# Altium PCB SAMV71_Xplained_Ultra.PcbDoc (part 4 of 7)
Units mm, origin at the board's own origin, x right, y up, seen from the top; angles counter-clockwise.
Board outline 90 x 135 mm, 8 copper layers (Top Layer LF-Signals, Ground Plane 1 (GND), Power Plane (VCC), Ground Plane 2 (GND), Signal Layer 1, Signal Layer 2, Ground Plane 3 (GND), Bottom Layer LF-Signals), stack 1.588 mm thick; 391 components, 330 nets, 1782 pads, 966 vias.
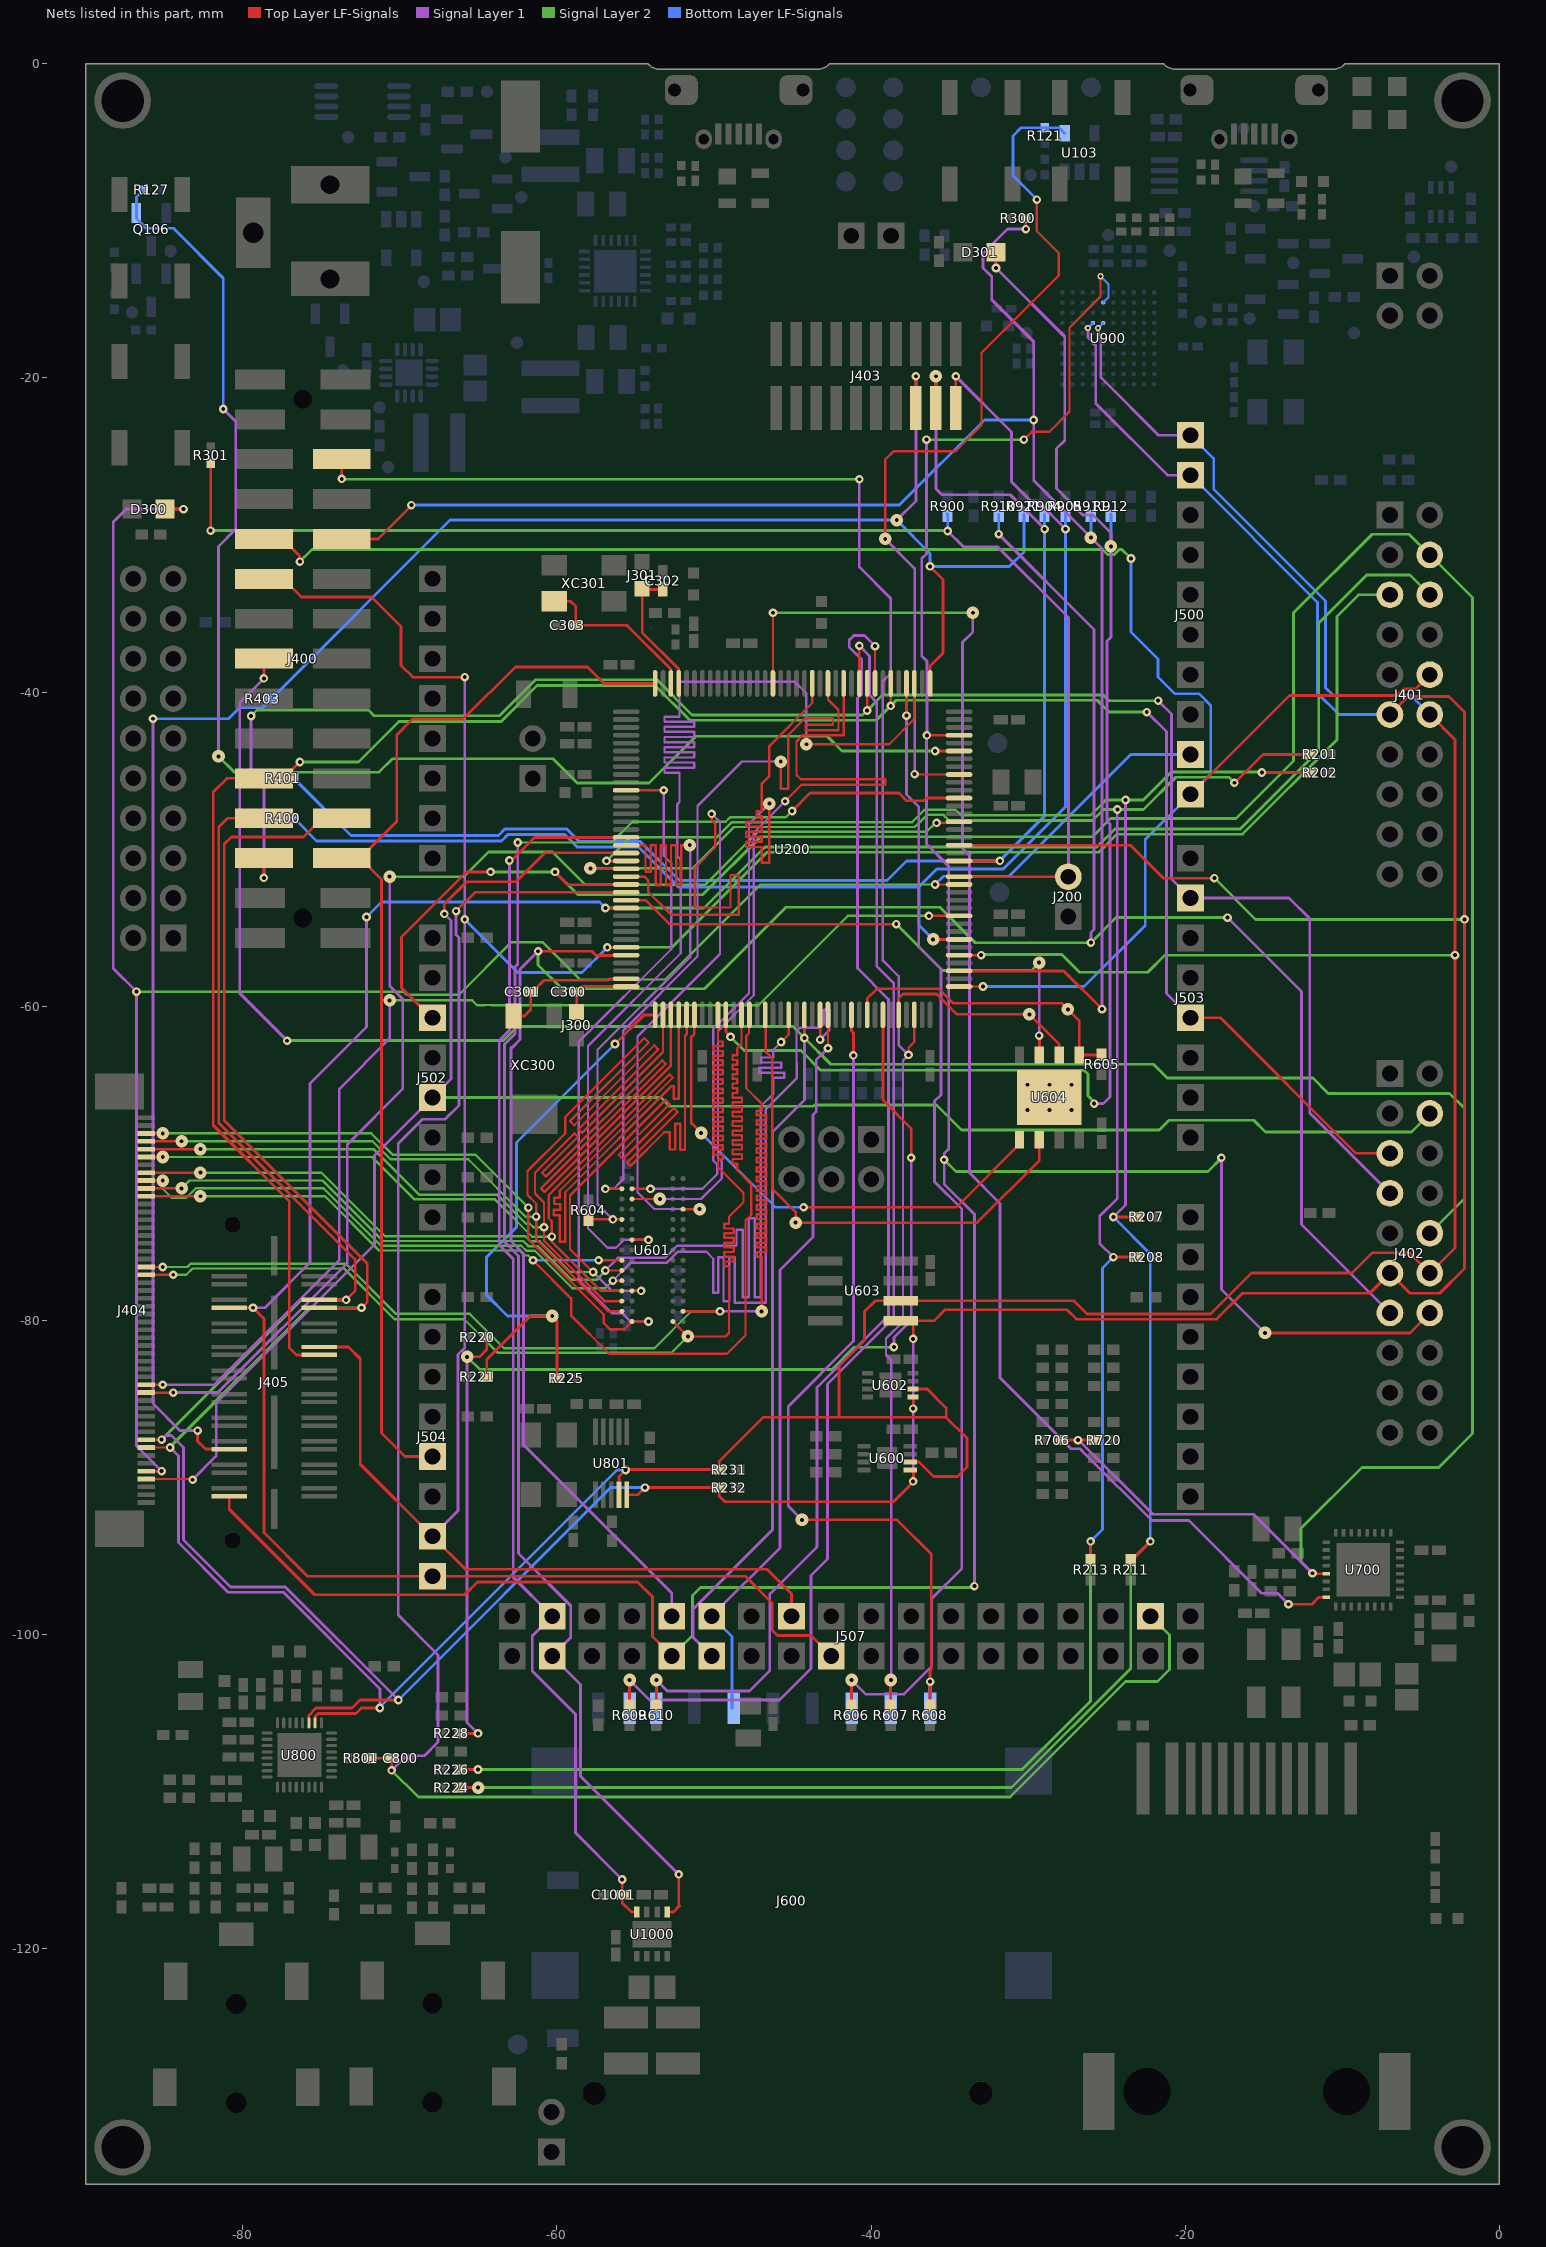
[diagram p10: the nets of this part, all layers, seen from the top]

## Via types
v1: diameter 0.55, hole 0.25, Top Layer LF-Signals to Bottom Layer LF-Signals, 547 vias
v2: diameter 0.55, hole 0.25, Top Layer LF-Signals to Bottom Layer LF-Signals, tented both sides, 190 vias
v3: diameter 0.55/0.55/0.55/0.8 (per signal layer), hole 0.25, Top Layer LF-Signals to Bottom Layer LF-Signals, tented top, 172 vias
v4: diameter 0.55, hole 0.25, Top Layer LF-Signals to Bottom Layer LF-Signals, tented top, 21 vias
v5: diameter 0.4, hole 0.2, Top Layer LF-Signals to Bottom Layer LF-Signals, tented both sides, 16 vias
v6: diameter 0.7, hole 0.35, Top Layer LF-Signals to Bottom Layer LF-Signals, 9 vias
v7: diameter 0.4, hole 0.2, Top Layer LF-Signals to Bottom Layer LF-Signals, tented top, 5 vias
v8: diameter 0.66, hole 0.33, Top Layer LF-Signals to Bottom Layer LF-Signals, tented top, 4 vias
v9: diameter 0.4, hole 0.2, Top Layer LF-Signals to Bottom Layer LF-Signals, 2 vias

## Nets (pads, with @x,y where several pads share a name; then routed paths per layer and width w, separated by ;. In a path a pad name is that pad's centre, name@x,y a point inside that pad or via, vN(x,y) a via of type N, cw(c..) or ccw(c..) an arc to the next point about the centre after c; other vN are vias at no path point) (continued)
PA03: J400.8 J401.11@-6.97,-41.43 J402.11@-6.97,-76.99 J404.42 J405.35 J500.9@-19.67,-26.19 R232.2 U200.91 U600.5 U602.5 U603.5 U800.3 U801.10 U900.G7 | length 290.1
  Top Layer LF-Signals w0.15: J404.42@-86.15,-87.6 v1(-85.175,-87.6)
  Top Layer LF-Signals w0.175: J400.8@-78.661,-48.034 -80.984,-48.034 -81.536,-48.586 -81.536,-67.434 -72.85,-76.12 -72.85,-78.125 v1(-73.425,-78.7) J405.35@-75.13,-78.7 ; U800.3@-75.8,-105.625 -75.8,-105.148 -75.34,-104.687 -73.063,-104.687 -72.543,-104.168 -70.107,-104.168 v1(-70.1,-104.175) ; U801.10@-55.55,-91.1 -54.85,-91.1 v1(-54.4,-90.65) R232.2@-49.675,-90.65 -49.675,-91.175 -49.3,-91.55 -38.575,-91.55 v1@-37.3,-90.275 ; U603.5@-38.125,-80.03 U603.5@-37.37,-80.03 ; U600.5@-37.5,-89.525 -37.3,-89.525 v1@-37.3,-90.25 ; v1(-37.325,-85.625) U602.5@-37.325,-84.875 ; v1(-37.325,-81.175) -37.325,-80.075 U603.5@-37.37,-80.03 ; U200.91@-34.4,-49.75 -23.5,-49.75 -21.4,-51.85 v1(-18.15,-51.85) ; J401.11@-6.97,-41.43 -5.824,-40.284 -3.216,-40.284 -2.225,-41.275 v1(-2.225,-54.475) -2.225,-76.7 -3.8,-78.275 -5.685,-78.275 J402.11@-6.97,-76.99 -8.255,-78.275 -16.35,-78.275 -18.001,-79.926 -26.918,-79.926 -27.52,-79.325 -35.3,-79.325 -36.005,-80.03 U603.5@-37.37,-80.03
  Signal Layer 1 w0.175: v1(-85.175,-87.6) -84.9,-87.325 -84.55,-87.325 -83.775,-88.1 -83.775,-93.975 -80.775,-96.975 -77.3,-96.975 v1(-70.1,-104.175) ; v1(-37.325,-90.25) v1(-37.325,-85.625) v1(-37.325,-81.175) ; v5(-26.2,-16.825) -26.2,-17.425 -25.7,-17.925 -25.7,-21.629 -21.139,-26.19 J500.9@-19.67,-26.19
  Signal Layer 2 w0.175: v1(-85.175,-87.6) -76.275,-78.7 v1(-73.425,-78.7) ; v1(-18.15,-51.85) -15.525,-54.475 v1(-2.225,-54.475)
  Bottom Layer LF-Signals w0.15: v5(-26.2,-16.825) U900.G7@-25.875,-16.5
  Bottom Layer LF-Signals w0.175: v1(-70.1,-104.175) -56.575,-90.65 v1(-54.4,-90.65) ; J500.9@-19.67,-26.19 -11.575,-34.285 -11.575,-40.075 -10.22,-41.43 J401.11@-6.97,-41.43
PA04: J400.7 J401.12@-4.43,-41.43 J402.12@-4.43,-76.99 J404.43 J405.33 J500.10@-19.67,-23.65 R231.2 U200.77 U600.6 U602.6 U603.6 U800.2 U801.9 U900.F7 | length 301.2
  Top Layer LF-Signals w0.15: J404.43@-86.15,-88.1 v1(-84.625,-88.1)
  Top Layer LF-Signals w0.175: U800.2@-75.4,-105.625 -75.4,-105.225 -75.2,-105.025 -72.8,-105.025 -72.455,-104.68 v1(-71.275,-104.68) ; J405.33@-75.13,-79.2 -75.105,-79.225 -72.475,-79.225 v1(-72.45,-79.2) -72.075,-78.825 -72.075,-76.4 -81.186,-67.289 -81.186,-49.686 -80.725,-49.225 -76.15,-49.225 -74.959,-48.034 J400.7@-73.708,-48.034 ; U801.9@-56.05,-91.1 -56.05,-89.948 v1(-55.627,-89.525) -55.602,-89.5 R231.2@-49.675,-89.5 -49.675,-88.975 -46.875,-86.175 -42.05,-86.175 ; U600.6@-37.5,-89.025 -36.95,-89.025 -36.025,-89.95 -34.5,-89.95 -33.9,-89.35 -33.9,-87.5 -35.225,-86.175 ; U602.6@-37.325,-84.375 -36.425,-84.375 -35.225,-85.575 -35.225,-86.175 ; U200.77@-34.4,-56.75 v1(-33,-56.75) ; J401.12@-4.43,-41.43 -2.825,-43.035 v1(-2.825,-56.75) -2.825,-75.385 J402.12@-4.43,-76.99 -5.72,-75.7 -8.1,-75.7 -9.39,-76.99 -15.79,-76.99 -18.401,-79.601 -26.249,-79.601 -27.09,-78.76 U603.6@-38.125,-78.76 -39.735,-78.76 -40.425,-79.45 -40.425,-81.275 -42.05,-82.9 -42.05,-86.175 ; -42.05,-86.175 -35.225,-86.175
  Signal Layer 1 w0.175: v1(-84.625,-88.1) -84.1,-88.625 -84.1,-94.15 -80.94,-97.31 -77.425,-97.31 -71.275,-103.46 v1(-71.275,-104.68) ; v5(-25.55,-16.825) -25.55,-17.125 -25.375,-17.3 -25.375,-19.975 -21.7,-23.65 J500.10@-19.67,-23.65
  Signal Layer 2 w0.175: v1(-84.625,-88.1) -84.625,-88.05 -75.787,-79.213 -72.463,-79.213 v1(-72.45,-79.2) ; v1(-33,-56.75) -32.962,-56.712 -27.863,-56.712 -26.736,-57.84 -22.39,-57.84 -21.3,-56.75 v1(-2.825,-56.75)
  Bottom Layer LF-Signals w0.15: v5(-25.55,-16.825) U900.F7@-25.225,-16.5
  Bottom Layer LF-Signals w0.175: v1@-71.155,-104.68 v1(-71.275,-104.68) -71.275,-104.625 -56.175,-89.525 v1(-55.627,-89.525) ; J500.10@-19.67,-23.65 -18.192,-25.127 -18.192,-27.083 -11.075,-34.2 -11.075,-39.725 -10.6,-40.2 -5.66,-40.2 J401.12@-4.43,-41.43
PA05: J400.22 J401.10@-4.43,-38.89 J500.1@-19.67,-46.51 U200.73 | length 117.4
  Top Layer LF-Signals w0.15: U200.73@-34.4,-58.75 v1(-32.875,-58.75) ; J500.1@-19.67,-46.51 J500.1@-19.23,-46.95
  Top Layer LF-Signals w0.175: J400.22@-78.661,-30.254 -77.446,-30.254 -76.375,-31.325 v1(-76.375,-31.7) ; J500.1@-19.67,-46.51 -13.371,-40.211 -6.504,-40.211 -6.099,-39.807 -5.347,-39.807 J401.10@-4.43,-38.89
  Signal Layer 2 w0.175: v1(-76.375,-31.7) -75.591,-30.916 -25.268,-30.916 -24.946,-31.238 -24.522,-31.238 -24.2,-30.916 -24.043,-30.916 v1(-23.459,-31.5)
  Bottom Layer LF-Signals w0.175: v1(-32.875,-58.75) -26.45,-58.75 -22.55,-54.85 -22.55,-49.39 J500.1@-19.67,-46.51 -18.375,-45.215 -18.375,-40.85 -19.125,-40.1 -20.675,-40.1 -21.738,-39.037 -21.738,-37.887 -23.459,-36.166 v1(-23.459,-31.5)
PA06: J400.10 J402.5@-6.97,-69.37 J405.25 J503.4@-19.67,-60.734 U200.114 | length 141.8
  Top Layer LF-Signals w0.175: v1(-76.375,-44.45) -77.419,-45.494 J400.10@-78.661,-45.494 -81.019,-45.494 -81.886,-46.361 -81.886,-67.579 -77.05,-72.415 -77.05,-81.725 -76.575,-82.2 J405.25@-75.13,-82.2 ; J503.4@-19.67,-60.734 -17.766,-60.734 -9.13,-69.37 J402.5@-6.97,-69.37
  Top Layer LF-Signals w0.18: v1(-38.75,-40.875) U200.114@-38.75,-39.45
  Signal Layer 1 w0.18: v1(-22.45,-41.275) -21.205,-42.52 -21.205,-59.199 J503.4@-19.67,-60.734
  Signal Layer 2 w0.175: v1(-76.375,-44.45) -72.65,-44.45 -70.064,-41.864
  Signal Layer 2 w0.18: -70.064,-41.864 -63.551,-41.864 -61.237,-39.55 -61.212,-39.575 -53.75,-39.575 -51.53,-41.795 -39.67,-41.795 -38.4,-40.525 -25.6,-40.525 -24.85,-41.275 v1(-22.45,-41.275)
PA07_XIN32: C301.1 U200.35 XC300.2 | length 8.8
  Top Layer LF-Signals w0.175: XC300.2@-62.775,-60.625 -62.075,-60.625 -61.675,-60.225 C301.1@-61.675,-59.075 -61.55,-59.075 -60.825,-58.35 -56.75,-58.35 -56.65,-58.25 U200.35@-55.6,-58.25
PA08_XOUT32: C300.1 J300.2 U200.36 | length 4.6
  Top Layer LF-Signals w0.175: J300.2@-58.75,-60.375 -58.75,-59.1 C300.1@-58.725,-59.075 -58.4,-58.75 U200.36@-55.6,-58.75
PA09: J400.21 R300.2 R911.1 U200.75 | length 114.1
  Top Layer LF-Signals w0.175: J400.21@-73.708,-30.254 -71.404,-30.254 -69.275,-28.125 v1(-69.275,-28.1) ; v2(-30.15,-10.525) R300.2@-30.15,-9.85
  Top Layer LF-Signals w0.18: U200.75@-34.4,-57.75 -27.734,-57.75 v1(-25.3,-60.184)
  Signal Layer 1 w0.18: v2(-30.15,-10.525) -31.325,-10.525 -32.875,-12.075 -32.875,-13 -32.325,-13.55 -32.325,-15.025 -29.65,-17.7 v1(-29.65,-22.675) -29.65,-26.525 v3(-26.009,-30.166) -25.305,-30.87 -25.305,-60.179 v1(-25.3,-60.184)
  Bottom Layer LF-Signals w0.175: v3(-26.009,-30.166) R911.1@-26.009,-28.668
  Bottom Layer LF-Signals w0.18: v1(-69.275,-28.1) -38.208,-28.1 -32.783,-22.675 v1(-29.65,-22.675)
PA10: R220.1 R228.1 U200.66 | length 78.1
  Top Layer LF-Signals w0.175: R228.1@-66.125,-106.3 v1(-65.025,-106.3) ; v3(-65.725,-82.325) -64.925,-82.325 -64.475,-81.875 R220.1@-64.475,-81.069 ; U200.66@-39.25,-60.55 -39.25,-65.975 -37.45,-67.775 v1(-37.45,-69.65)
  Signal Layer 1 w0.175: v3(-65.725,-82.325) -65.725,-105.6 v1(-65.025,-106.3) ; v1(-38.55,-81.7) -38.55,-81.104 -37.45,-80.004 v1(-37.45,-69.65)
  Signal Layer 2 w0.175: v3(-65.725,-82.325) -64.912,-83.138 -42.5,-83.138 -41.075,-81.713 -38.563,-81.713 v1(-38.55,-81.7)
PA11: R605.2 U200.64 U604.1 | length 19.2
  Top Layer LF-Signals w0.165: U200.64@-40.25,-60.55 -40.25,-59.514 -39.636,-58.9 -35.69,-58.9 -34.765,-59.825 -27.85,-59.825 -26.745,-60.93 U604.1@-26.745,-63.1
  Top Layer LF-Signals w0.175: U604.1@-26.745,-63.1 R605.2@-25.325,-63.1
  other v3: -27.475,-60.2
PA12: U200.68 U604.2 | length 13.4
  Top Layer LF-Signals w0.165: U200.68@-38.25,-60.55 -38.25,-59.514 -37.961,-59.225 -35.825,-59.225 -34.525,-60.525 v3(-29.925,-60.525) -28.015,-62.435 U604.2@-28.015,-63.1
PA13: U200.42 U604.5 | length 32
  Top Layer LF-Signals w0.165: U200.42@-51.25,-60.55 -51.25,-61.76 -51.45,-61.96 -51.45,-67.45 v3(-50.825,-68.075) ; v1(-44.3,-72.8) -34.572,-72.8 U604.5@-30.555,-68.783
  Top Layer LF-Signals w0.175: U604.5@-30.555,-68.783 U604.5@-30.555,-68.5
  Bottom Layer LF-Signals w0.165: v3(-50.825,-68.075) -46.1,-72.8 v1(-44.3,-72.8)
PA14: U200.51 U604.6 | length 32.5
  Top Layer LF-Signals w0.15: U200.51@-46.75,-60.55 U200.51@-46.717,-60.583
  Top Layer LF-Signals w0.165: U200.51@-46.717,-60.583 -46.717,-62.883 -46.3,-63.3 -46.3,-71.6 -44.802,-73.098 v3(-44.802,-73.779) -33.245,-73.779 -29.285,-69.819 U604.6@-29.285,-68.5
PA15: J404.20 U200.49 U601.B1 | length 82.8
  Top Layer LF-Signals w0.15: J404.20@-86.15,-76.6 v1(-85.1,-76.6) ; U601.B1@-51.972,-79.425 v1(-49.625,-79.425) ; U200.49@-47.75,-60.55 -47.775,-60.575 -47.775,-61.725 -47.95,-61.9 -47.95,-65.225 -46.975,-66.2 -46.975,-66.65 -47.275,-66.65 -47.275,-66.95 -46.675,-66.95 -46.675,-67.25 -47.275,-67.25 -47.275,-67.55 -46.675,-67.55 -46.675,-67.85 -47.275,-67.85 -47.275,-68.15 -46.675,-68.15 -46.675,-68.45 -47.275,-68.45 -47.275,-68.75 -46.675,-68.75 -46.675,-69.05 -47.275,-69.05 -47.275,-69.35 -46.675,-69.35 -46.675,-69.65 -47.275,-69.65 -47.275,-69.95 -46.675,-69.95 -46.675,-70.25 -47.275,-70.25 -47.275,-70.55 -46.675,-70.55 -46.675,-70.85 -47.275,-70.85 -47.275,-71.15 -46.675,-71.15 -46.675,-71.45 -47.275,-71.45 -47.275,-71.75 -46.675,-71.75 -46.675,-72.05 -47.275,-72.05 -47.275,-72.35 -46.675,-72.35 -46.675,-72.65 -47.275,-72.65 -47.275,-72.95 -46.675,-72.95 -46.675,-73.25 -47.275,-73.25 -47.275,-73.55 -46.675,-73.55 -46.675,-73.85 -47.275,-73.85 -47.275,-74.15 -46.675,-74.15 -46.675,-74.45 -47.275,-74.45 -47.275,-74.75 -46.675,-74.75 -46.675,-75.05 -47.275,-75.05 -47.275,-75.35 -46.675,-75.35 -46.675,-75.65 -47.275,-75.65 -47.275,-75.95 -46.975,-75.95 v3(-46.975,-79.425)
  Signal Layer 1 w0.15: v1(-49.625,-79.425) v3(-46.975,-79.425)
  Signal Layer 2 w0.15: v1(-85.1,-76.6) -83.524,-76.6 -83.324,-76.4 -73.443,-76.4 -70.254,-79.589 -65.56,-79.589 -63.374,-81.775 -53.801,-81.775 -51.451,-79.425 v1(-49.625,-79.425)
PA16: J404.21 U200.45 U601.A2 | length 83.1
  Top Layer LF-Signals w0.15: J404.21@-86.15,-77.1 v1(-84.433,-77.1) ; U601.A2@-52.622,-80.075 v3(-51.672,-81.025) -49.275,-81.025 -49.05,-80.8 -49.05,-76.55 -49.35,-76.55 -49.35,-76.25 -48.75,-76.25 -48.75,-75.95 -49.35,-75.95 -49.35,-75.65 -48.75,-75.65 -48.75,-75.35 -49.35,-75.35 -49.35,-75.05 -48.75,-75.05 -48.75,-74.75 -49.35,-74.75 -49.35,-74.45 -48.75,-74.45 -48.75,-74.15 -49.35,-74.15 -49.35,-73.85 -49.05,-73.85 -49.05,-73.4 -48.127,-72.477 -48.127,-71.873 -49.75,-70.25 -49.75,-69.75 -49.45,-69.75 -49.45,-69.45 -50.05,-69.45 -50.05,-69.15 -49.45,-69.15 -49.45,-68.85 -50.05,-68.85 -50.05,-68.55 -49.45,-68.55 -49.45,-68.25 -50.05,-68.25 -50.05,-67.95 -49.45,-67.95 -49.45,-67.65 -50.05,-67.65 -50.05,-67.35 -49.45,-67.35 -49.45,-67.05 -50.05,-67.05 -50.05,-66.75 -49.45,-66.75 -49.45,-66.45 -50.05,-66.45 -50.05,-66.15 -49.45,-66.15 -49.45,-65.85 -50.05,-65.85 -50.05,-65.55 -49.45,-65.55 -49.45,-65.25 -50.05,-65.25 -50.05,-64.95 -49.45,-64.95 -49.45,-64.65 -50.05,-64.65 -50.05,-64.35 -49.45,-64.35 -49.45,-64.05 -50.05,-64.05 -50.05,-63.75 -49.45,-63.75 -49.45,-63.45 -50.05,-63.45 -50.05,-63.15 -49.45,-63.15 -49.45,-62.85 -50.05,-62.85 -50.05,-62.55 -49.45,-62.55 -49.45,-62.25 -49.75,-62.25 U200.45@-49.75,-60.55
  Signal Layer 2 w0.15: v1(-84.433,-77.1) -83.6,-77.1 -83.2,-76.7 -73.567,-76.7 -70.342,-79.925 -65.9,-79.925 -63.75,-82.075 -52.722,-82.075 v3(-51.672,-81.025)
PA17: U200.25 U604.3 | length 34.3
  Top Layer LF-Signals w0.175: U200.25@-55.6,-53.25 -54.363,-53.25 -52.838,-54.775 v1@-38.375,-54.775 ; v1(-29.3,-61.875) -29.285,-61.89 U604.3@-29.285,-63.1
  Signal Layer 1 w0.175: v1(-29.3,-61.875) v3(-29.3,-57.225)
  Signal Layer 2 w0.175: v1(-38.4,-54.775) -35.45,-57.725 -29.8,-57.725 v3(-29.3,-57.225)
PA18: C800.2 J507.3 R801.1 U200.24 | length 131.1
  Top Layer LF-Signals w0.15: v1(-70.525,-108.65) C800.2@-70.525,-107.875
  Top Layer LF-Signals w0.175: R801.1@-71.9,-107.875 C800.2@-70.525,-107.875 ; v1(-66.425,-53.95) -65.225,-52.75 U200.24@-55.6,-52.75
  Signal Layer 1 w0.175: v1(-70.525,-108.65) -69.6,-107.725 -68.45,-107.725 -67.575,-106.85 -67.575,-101.3 -70.1,-98.775 -70.1,-68.725 -68.575,-67.2 -67.125,-67.2 -66.241,-66.316 -66.241,-55.634 -66.425,-55.45 v1(-66.425,-53.95)
  Signal Layer 2 w0.175: v1(-70.525,-108.65) -68.825,-110.35 -31.151,-110.35 -23.801,-103 -21.775,-103 -21,-102.225 -21,-100.044 J507.3@-22.21,-98.834
PA19: J401.4@-4.43,-31.27 J502.3@-67.93,-60.734 R706.1 R720.1 U200.23 U700.29 | length 189.3
  Top Layer LF-Signals w0.15: v1(-11.9,-96.1) -11.875,-96.125 U700.29@-11.025,-96.125
  Top Layer LF-Signals w0.18: J502.3@-67.93,-60.734 -67.991,-60.734 -69.9,-58.825 -69.9,-55.585 -65.765,-51.45 v1(-64.225,-51.45) ; v1(-60.125,-51.45) -59.31,-52.265 -55.615,-52.265 U200.23@-55.6,-52.25 ; R706.1@-27.869,-87.623 R720.1@-25.794,-87.623
  Signal Layer 1 w0.18: v1@-26.863,-87.623 v1(-26.825,-87.623) -26.787,-87.623 -22.061,-92.349 -15.651,-92.349 v1(-11.9,-96.1)
  Signal Layer 2 w0.18: v1(-64.225,-51.45) v1(-60.125,-51.45) -58.67,-52.905 -50.726,-52.905 -47.031,-49.21 -25.91,-49.21 -24.758,-48.058 -16.771,-48.058 -13.1,-44.387 -13.1,-34.955 -8.095,-29.95 -5.75,-29.95 J401.4@-4.43,-31.27 -1.71,-33.99 -1.71,-87.203 -3.866,-89.359 -8.747,-89.359 -12.629,-93.241 -12.629,-95.371 v1(-11.9,-96.1)
PA20: U200.22 U601.M1 | length 54.5
  Top Layer LF-Signals w0.15: U200.22@-55.6,-51.75 -54.422,-51.75 -54.196,-51.976 -54.196,-52.709 -52.738,-54.168 -48.434,-54.168 -48.434,-51.647 -48.95,-51.647 -48.95,-53.715 -51.223,-53.715 -51.223,-51.18 -49.925,-49.882 -49.925,-48.395 -50.152,-48.168 v1(-50.152,-47.752) ; U601.M1@-51.972,-72.925 v3(-50.922,-72.925)
  Signal Layer 1 w0.15: v3@-50.935,-72.912 -53.805,-72.912 -54.875,-71.843 -54.875,-61.925 -49.625,-56.675 -49.625,-48.28 v1(-50.152,-47.752)
PA21: J402.13@-6.97,-79.53 J507.27 R910.1 U200.32 | length 161.5
  Top Layer LF-Signals w0.18: v1@-61.15,-56.5 -57.773,-56.5 -57.508,-56.765 -55.6,-56.765 U200.32@-55.6,-56.75
  Signal Layer 1 w0.175: v1(-31.875,-29.95) -25.812,-36.013
  Signal Layer 1 w0.18: v1(-61.2,-56.5) -62.35,-57.65 -62.35,-62.125 -62.85,-62.625 -62.925,-62.625 -62.925,-74.958 -62.125,-75.758 -62.125,-87.925 -52.69,-97.36 J507.27@-52.69,-98.834 ; v1(-26.009,-55.957) -26.009,-55.314 -25.81,-55.115 -25.81,-36.015 -25.812,-36.013 ; v1(-17.307,-54.362) -12.595,-59.074 -12.595,-73.905 J402.13@-6.97,-79.53
  Signal Layer 2 w0.18: v1(-61.2,-56.5) -61.2,-57.37 -59.677,-58.893 -50.616,-58.893 -45.424,-53.701 -35.626,-53.701 -33.369,-55.957 v1(-26.009,-55.957) -24.414,-54.362 v1(-17.307,-54.362)
  Bottom Layer LF-Signals w0.18: v1(-31.875,-29.95) R910.1@-31.875,-28.675
PA22: R221.1 R225.1 U200.37 | length 37.9
  Top Layer LF-Signals w0.185: R221.1@-64.475,-83.594 -64.475,-82.5 -61.7,-79.725 v3(-60.3,-79.725) -60,-80.025 R225.1@-60,-83.675 ; v1(-56.303,-62.403) -54.45,-60.55 U200.37@-53.75,-60.55
  Bottom Layer LF-Signals w0.185: v3(-60.3,-79.725) -63.15,-79.725 -64.5,-78.375 -64.5,-76 -62.575,-74.075 -62.575,-68.675 v1(-56.303,-62.403)
PA23: D301.1 R912.1 U200.46 | length 88.3
  Top Layer LF-Signals w0.18: U200.46@-49.25,-60.55 -49.25,-61.65 v1(-48.95,-61.95) ; v1(-32.05,-13) D301.1@-32.05,-12
  Signal Layer 1 w0.18: v1(-32.05,-13) -27.675,-17.375 -27.675,-23.975 -28.2,-24.5 -28.2,-27.05 -26.525,-28.725 -25.875,-28.725 -24.734,-29.866 v3(-24.734,-30.725) -24.734,-36.509 -24.975,-36.75 -24.975,-48.225 -24.785,-48.415 -24.785,-65.775 -25.21,-66.2 v1(-25.8,-66.2)
  Signal Layer 2 w0.18: v1(-48.95,-61.95) -48.075,-62.825 -44.475,-62.825 -43.225,-64.075 -26.45,-64.075 -26.2,-64.325 -26.2,-65.7 -25.8,-66.1 v1(-25.8,-66.2)
  Bottom Layer LF-Signals w0.175: v3(-24.734,-30.725) R912.1@-24.734,-28.668
PA24: J400.16 J402.10@-4.43,-74.45 J507.26 U200.56 | length 156.8
  Top Layer LF-Signals w0.175: v1@-78.661,-39.127 J400.16@-78.661,-37.874
  Top Layer LF-Signals w0.18: v1(-44.25,-62.025) U200.56@-44.25,-60.55
  Signal Layer 1 w0.18: v1(-78.658,-39.13) -80.2,-40.672 -80.2,-59.175 v1(-77.176,-62.199) ; J507.26@-50.15,-101.374 -51.325,-100.199 -51.325,-98.375 -46.285,-93.335 -46.285,-68.01 -44.25,-65.975 v1(-44.25,-62.025)
  Signal Layer 2 w0.18: v1(-77.176,-62.199) -77.161,-62.184 -63.409,-62.184 -62.525,-61.3 -44.975,-61.3 v1(-44.25,-62.025) -42.575,-63.7 -22.025,-63.7 -21.15,-64.575 -11.875,-64.575 -10.9,-65.55 -3.175,-65.55 -2.225,-66.5 -2.225,-72.245 J402.10@-4.43,-74.45
PA25: J507.25 J600.5 U200.59 | length 47.8
  Top Layer LF-Signals w0.15: v1(-42.75,-62.675) U200.59@-42.75,-60.55
  Signal Layer 1 w0.175: J507.25@-50.15,-98.834 -45.8,-94.484 -45.8,-76.8 -43.7,-74.7 -43.7,-66.914 -43.5,-66.714 -43.5,-63.425 v1(-42.75,-62.675)
  Bottom Layer LF-Signals w0.175: J507.25@-50.15,-98.834 -48.85,-100.134 J600.5@-48.85,-104.7
PA26: J600.9 R608.1 U200.62 | length 54.9
  Top Layer LF-Signals w0.175: v3(-44.4,-92.7) -38.35,-92.7 -36.175,-94.875 -36.175,-102.25 -36.248,-102.323 v1(-36.248,-103) -36.248,-104.545 R608.1@-36.253,-104.55 ; U200.62@-41.25,-60.55 -41.25,-61.575 -41.127,-61.698 v1(-41.127,-63.128)
  Signal Layer 1 w0.175: v3(-44.4,-92.7) -45.275,-91.825 -45.275,-85.475 -41.127,-81.327 v1(-41.127,-63.128)
  Bottom Layer LF-Signals w0.175: J600.9@-36.248,-104.7 v1(-36.248,-103) v1@-36.248,-102.9
PA27: J400.25 J600.1 R607.1 U200.70 | length 119.4
  Top Layer LF-Signals w0.15: v1(-37.625,-63.1) -37.625,-62.65 -37.252,-62.277 U200.70@-37.252,-60.552
  Top Layer LF-Signals w0.175: v4@-73.708,-26.427 J400.25@-73.708,-25.174 ; R607.1@-38.753,-104.55 v3@-38.753,-102.9 ; U200.70@-37.252,-60.552 U200.70@-37.25,-60.55
  Signal Layer 1 w0.15: -38.75,-36.275 -38.75,-38.8 -39.25,-39.3 -39.25,-57.1 -38.252,-58.098 -38.252,-62.473 v1(-37.625,-63.1) -37.975,-63.45 -37.975,-80.087 -39.05,-81.162 -39.05,-82.2 -38.725,-82.525 v3@-38.725,-102.9
  Signal Layer 1 w0.175: v1(-40.75,-26.45) -40.75,-32.05 -38.75,-34.05 -38.75,-36.275
  Signal Layer 2 w0.15: v4(-73.705,-26.43) -73.685,-26.45 v1(-40.75,-26.45)
  Bottom Layer LF-Signals w0.15: J600.1@-38.748,-104.7 v3(-38.748,-102.9)
  Bottom Layer LF-Signals w0.175: v1@-40.895,-26.43 -40.875,-26.45 v1(-40.75,-26.45)
PA28: J600.2 R606.1 U200.112 | length 74.8
  Top Layer LF-Signals w0.175: R606.1@-41.253,-104.55 v3@-41.253,-102.9 ; v1(-37.75,-41.5) U200.112@-37.75,-39.45
  Signal Layer 1 w0.175: v3(-41.248,-102.9) -40.348,-103.8 -37.9,-103.8 -36.15,-102.05 -36.15,-97.725 -34.225,-95.8 -34.225,-72.91 -35.959,-71.176 -35.959,-66.045 -35.555,-65.641 -35.555,-57.635 -36.964,-56.225 -36.964,-47.311 -37.75,-46.525 v1(-37.75,-41.5)
  Bottom Layer LF-Signals w0.175: J600.2@-41.248,-104.7 v3(-41.248,-102.9)
PA29: U200.129 U700.32 | length 94.1
  Top Layer LF-Signals w0.15: U200.129@-46.25,-39.45 -46.25,-35.675 v1(-46.25,-34.95)
  Top Layer LF-Signals w0.175: v1(-13.425,-98.075) -11.925,-98.075 -11.475,-97.625 U700.32@-11.025,-97.625
  Signal Layer 1 w0.175: v3(-33.525,-34.95) -33.525,-36.175 -34.18,-36.83 -34.18,-49.953 -33.745,-50.388 -33.745,-70.605 -31.795,-72.555 -31.795,-83.656 -27.276,-88.175 -26.698,-88.175 -26.312,-88.561 -26.312,-88.563 -22.126,-92.75 -19.775,-92.75 -15.15,-97.375 -14.125,-97.375 v1(-13.425,-98.075)
  Signal Layer 2 w0.15: v1(-46.25,-34.95) v3(-33.525,-34.95)
PA30: J600.7 R610.1 U200.116 | length 85.9
  Top Layer LF-Signals w0.15: U200.116@-39.75,-39.45 v1@-39.75,-37.1
  Top Layer LF-Signals w0.175: R610.1@-53.678,-104.55 v3(-53.678,-102.9) ; v1@-39.75,-37.1 v1(-39.75,-37.075)
  Signal Layer 1 w0.175: v3(-53.678,-102.9) -52.978,-103.6 -47.75,-103.6 -46.45,-102.3 -46.45,-97.425 -43.45,-94.425 -43.45,-84.265 -38.889,-79.705 -38.889,-59.561 -40.87,-57.58 -40.87,-40.378 -40.6,-40.108 -40.6,-37.925 -41.4,-37.125 -41.4,-36.7 -41.1,-36.4 -40.425,-36.4 v1(-39.75,-37.075)
  Bottom Layer LF-Signals w0.175: J600.7@-53.678,-104.7 v3(-53.678,-102.9)
PA31: J600.8 R609.1 U200.118 | length 87
  Top Layer LF-Signals w0.15: U200.118@-40.75,-39.45 v1(-40.75,-37.05)
  Top Layer LF-Signals w0.175: R609.1@-55.378,-104.55 v3(-55.378,-102.9)
  Signal Layer 1 w0.175: v3(-55.378,-102.9) -54.103,-104.175 -45.827,-104.175 -43.825,-102.173 -43.825,-96.25 -42.775,-95.2 -42.775,-84.05 -38.564,-79.839 -38.564,-58.529 -39.65,-57.443 -39.65,-40.65 -40.1,-40.2 -40.1,-37.7 v1(-40.75,-37.05)
  Bottom Layer LF-Signals w0.175: J600.8@-55.378,-104.7 v3(-55.378,-102.9)
PAD: U604.0
  other v1: -30.05,-66.6 -28.65,-66.6 -27.25,-66.6 -30.05,-65
  other v3: -28.65,-65
  other v4: -27.25,-65
PB00: R201.1 R208.1 R213.1 R226.1 U200.21 | length 154.5
  Top Layer LF-Signals w0.15: v3@-57.85,-51.25 -56.818,-51.25 U200.21@-55.6,-51.25
  Top Layer LF-Signals w0.175: R226.1@-66.125,-108.6 v1(-65.025,-108.6) ; v3(-57.875,-51.225) v3@-57.85,-51.25 ; v1@-16.863,-45.788 -15.05,-43.975 R201.1@-12.05,-43.975
  Top Layer LF-Signals w0.18: R213.1@-26.025,-95.269 v1(-26.025,-94.075) ; v1@-24.569,-75.969 R208.1@-23.1,-75.969
  Signal Layer 1 w0.175: v1(-24.575,-75.975) -25.45,-75.1 -25.45,-73.375 -24.325,-72.25 v1(-24.325,-47.475)
  Signal Layer 2 w0.15: v3(-57.875,-51.225) -57.082,-51.225 -57.057,-51.25 -56.643,-51.25 -56.618,-51.225 -51.365,-51.225 -48.735,-48.595 -37.232,-48.595 -37.082,-48.445 -37.052,-48.445
  Signal Layer 2 w0.175: -37.052,-48.433 -36.434,-47.815 -35.398,-47.815 -35.038,-48.175 -25.899,-48.175 -25.199,-47.475 v1(-24.325,-47.475) -22.66,-47.475 -20.607,-45.422 -17.228,-45.422 v1(-16.875,-45.775)
  Signal Layer 2 w0.18: v1(-65.025,-108.6) -30.375,-108.6 -26.025,-104.25 v1(-26.025,-94.075)
  Bottom Layer LF-Signals w0.18: v1(-26.025,-94.075) -25.275,-93.325 -25.275,-76.675 v1(-24.575,-75.975)
PB01: R202.1 R207.1 R211.1 R224.1 U200.20 | length 154.8
  Top Layer LF-Signals w0.18: R224.1@-66.125,-109.75 v3(-65.025,-109.75) ; v1(-56.85,-50.75) U200.20@-55.6,-50.75 ; v1@-24.569,-73.419 R207.1@-23.1,-73.419 ; R211.1@-23.475,-95.275 -23.425,-95.275 v1(-22.225,-94.075) ; v1(-15.125,-45.125) R202.1@-12.05,-45.125
  Signal Layer 1 w0.18: v1(-24.575,-73.425) -23.8,-72.65 v1(-23.8,-46.875)
  Signal Layer 2 w0.15: v1(-56.85,-50.75) -55.35,-49.25 -51.2,-49.25 -51.198,-49.252 -49.838,-49.252 -48.865,-48.28 -37.387,-48.28 -36.595,-47.487 -34.638,-47.487 -34.278,-47.847 -26.034,-47.847 -25.684,-47.498
  Signal Layer 2 w0.18: v3(-65.025,-109.75) -31.058,-109.75 -23.475,-102.167 -23.475,-95.325 v1(-22.225,-94.075) ; -25.684,-47.498 -25.062,-46.875 v1(-23.8,-46.875) -22.675,-46.875 -20.895,-45.095 -15.155,-45.095 v1(-15.125,-45.125)
  Bottom Layer LF-Signals w0.18: v1(-24.575,-73.425) -22.225,-75.775 v1(-22.225,-94.075)
PB02: J401.6@-4.43,-33.81 J405.34 J504.8@-67.93,-96.294 J507.20 U200.26 | length 168.5
  Top Layer LF-Signals w0.15: v1(-56.925,-53.75) U200.26@-55.6,-53.75
  Top Layer LF-Signals w0.18: J405.34@-80.87,-79.2 v1(-79.35,-79.2) -78.65,-79.9 -78.65,-93.519 -75.875,-96.294 J504.8@-67.93,-96.294 -48,-96.294 -46.3,-97.994 -46.3,-99.725 -45.95,-100.075 -43.829,-100.075 J507.20@-42.53,-101.374
  Signal Layer 1 w0.18: v1(-79.35,-79.2) -78.6,-79.2 -75.725,-76.325 -75.725,-64.925 -72.125,-61.325 v1(-72.125,-54.325)
  Signal Layer 2 w0.18: v1(-56.925,-53.75) -50.637,-53.75 -46.757,-49.87 -25.637,-49.87 -24.484,-48.717 -16.497,-48.717 -11.506,-43.726 -11.506,-35.606 -8.45,-32.55 -5.69,-32.55 J401.6@-4.43,-33.81
  Bottom Layer LF-Signals w0.18: v1(-72.125,-54.325) -71.175,-53.375 -57.3,-53.375 v1(-56.925,-53.75)
PB03: J400.20 J401.5@-6.97,-33.81 J405.27 J504.7@-67.93,-93.754 J507.21 U200.31 | length 190.6
  Top Layer LF-Signals w0.175: J400.20@-78.661,-32.794 -77.431,-32.794 -76.275,-33.95 -71.8,-33.95 -69.925,-35.825 -69.925,-38.3 -69.175,-39.05 v1(-65.875,-39.05) ; v1(-56.8,-56.25) U200.31@-55.6,-56.25 U200.31@-55.4,-56.25
  Top Layer LF-Signals w0.18: J405.27@-75.13,-81.7 -73.275,-81.7 -72.525,-82.45 -72.525,-89.159 J504.7@-67.93,-93.754 -65.834,-95.85 -46.625,-95.85 -45.07,-97.405 J507.21@-45.07,-98.834
  Signal Layer 1 w0.175: J504.7@-67.93,-93.754 -66.3,-92.124 -66.3,-82.175 -65.875,-81.75 v1(-65.875,-54.475) v1(-65.875,-39.05)
  Signal Layer 2 w0.18: v1(-56.8,-56.25) -52.671,-56.25 -46.621,-50.2 -25.5,-50.2 -24.347,-49.047 -16.361,-49.047 -10.35,-43.037 -10.35,-35.19 -8.97,-33.81 J401.5@-6.97,-33.81
  Bottom Layer LF-Signals w0.175: v1(-65.875,-54.475) -62.5,-57.85 -58.4,-57.85 v1(-56.8,-56.25)
PB04: J402.14@-4.43,-79.53 J405.2 J507.28 U200.105 U900.F9 | length 197.5
  Top Layer LF-Signals w0.15: v1(-30.273,-23.929) -29.766,-23.422 -28.652,-23.422 -27.375,-22.145 -27.375,-16.8 -25.4,-14.825 v5(-25.4,-13.525)
  Top Layer LF-Signals w0.175: v3(-14.925,-80.8) -5.7,-80.8 J402.14@-4.43,-79.53
  Top Layer LF-Signals w0.18: J405.2@-80.87,-91.2 -80.87,-92.03 -75.425,-97.475 -65.875,-97.475 -65.05,-96.65 -54.874,-96.65 -53.925,-97.599 -53.925,-100.139 J507.28@-52.69,-101.374 ; v1(-36.452,-42.752) -36.427,-42.752 -36.425,-42.75 U200.105@-34.4,-42.75
  Signal Layer 1 w0.175: v1@-17.7,-69.625 -17.7,-78.025 v3(-14.925,-80.8)
  Signal Layer 1 w0.18: v1(-36.477,-23.929) -36.477,-31.201 -36.781,-31.505 -36.781,-37.71 -36.452,-38.039 v1(-36.452,-42.752) -36.456,-42.752 -36.467,-42.742 -36.467,-49.683 -35.062,-51.088 -35.062,-69.097 -35.35,-69.385 v1(-35.35,-69.775) -35.35,-71.322 -33.425,-73.247 v1(-33.425,-96.925)
  Signal Layer 2 w0.15: v1(-36.477,-23.929) v1(-30.273,-23.929)
  Signal Layer 2 w0.175: v1(-35.35,-69.775) -34.6,-70.525 -18.55,-70.525 v1@-17.675,-69.65
  Signal Layer 2 w0.18: J507.28@-52.69,-101.374 -51.375,-100.059 -51.375,-97.519 -50.856,-97 -33.5,-97 v1(-33.425,-96.925)
  Bottom Layer LF-Signals w0.125: -24.9,-14.879 -24.9,-14.025
  Bottom Layer LF-Signals w0.15: v5(-25.4,-13.525) -24.9,-14.025 ; U900.F9@-25.225,-15.2 -24.904,-14.879
  other v1: -17.7,-69.65
PB05: J403.6 J405.10 R403.2 R921.2 U200.109 | length 135.1
  Top Layer LF-Signals w0.185: v1(-82.875,-87.025) -82.9,-87.05 -82.9,-87.675 -82.375,-88.2 J405.10@-80.87,-88.2 ; J403.6@-37.15,-21.91 v1(-37.15,-19.893) ; U200.109@-36.25,-39.45 -36.25,-38.35 -35.425,-37.525 -35.425,-32.825 v1(-36.25,-32)
  Signal Layer 1 w0.185: v1(-85.725,-41.7) -85.725,-85.3 -84,-87.025 v1(-82.875,-87.025) ; v3(-38.368,-29.053) -37.15,-27.835 v1(-37.15,-19.893)
  Bottom Layer LF-Signals w0.185: v1(-85.725,-41.7) -80.923,-41.7 -80.223,-41 -78.756,-41 R403.2@-78.177,-40.421 -66.808,-29.053 v3(-38.368,-29.053) -36.25,-31.171 v1(-36.25,-32) -31.2,-32 -30.275,-31.075 R921.2@-30.275,-28.668
PB06_SWDIO: J403.2 R400.2 R905.2 U200.79 | length 92.1
  Top Layer LF-Signals w0.185: v3(-36.05,-55.75) U200.79@-34.4,-55.75 ; J403.2@-34.61,-21.91 v1(-34.61,-19.893)
  Signal Layer 1 w0.185: v1(-34.61,-19.893) -31.064,-23.44 -31.064,-26.614 -29.854,-27.823 -29.427,-27.823 v1(-27.625,-29.625)
  Bottom Layer LF-Signals w0.185: R400.2@-76.625,-48.154 -75.304,-49.475 -63.525,-49.475 -63.108,-49.058 -59.516,-49.058 -58.714,-49.86 -54.814,-49.86 -52.275,-52.399 -36.949,-52.399 ; v3(-36.05,-55.75) -36.949,-54.851 -36.949,-52.399 ; R905.2@-27.625,-28.668 v1(-27.625,-29.625) -27.625,-47.307 -31.586,-51.267 -35.818,-51.267 -36.949,-52.399
PB07_SWCLK: J403.4 R401.2 R904.2 U200.89 | length 91.3
  Top Layer LF-Signals w0.185: J403.4@-35.88,-21.91 v3(-35.88,-19.893) ; U200.89@-34.4,-50.75 v1(-31.8,-50.75)
  Signal Layer 1 w0.185: v3(-35.88,-19.893) -35.88,-27.042 -35.484,-27.438 -31.137,-27.438 v1(-28.95,-29.625)
  Bottom Layer LF-Signals w0.185: R401.2@-76.601,-45.645 -73.12,-49.126 -63.726,-49.126 -63.323,-48.723 -59.377,-48.723 -58.575,-49.525 -54.675,-49.525 -52.2,-52 -38.99,-52 -37.74,-50.75 v1(-31.8,-50.75) ; v1@-31.815,-50.735 -28.95,-47.87 v1(-28.95,-29.625) R904.2@-28.95,-28.668
PB08_XOUT: C302.1 J301.2 U200.141 | length 8.2
  Top Layer LF-Signals w0.175: J301.2@-54.575,-33.425 -54.575,-36.2 -52.25,-38.525 U200.141@-52.25,-39.45 ; J301.2@-54.525,-33.475 C302.1@-53.275,-33.475
PB09_XIN: C303.1 U200.142 XC301.1 | length 10.8
  Top Layer LF-Signals w0.175: XC301.1@-60.175,-34.225 -59.125,-34.225 -58.8,-34.55 C303.1@-58.8,-35.75 -55.55,-35.75 -52.75,-38.55 U200.142@-52.75,-39.45
PB12: J200.2@-27.442,-51.755 R301.2 R900.2 U200.87 | length 85.8
  Top Layer LF-Signals w0.175: v1(-82.05,-29.725) R301.2@-82.05,-25.425 ; U200.87@-34.395,-51.755 J200.2@-27.442,-51.755
  Signal Layer 1 w0.175: v1(-35.125,-29.75) -34.125,-30.75 -31.95,-30.75 -27.442,-35.258 J200.2@-27.442,-51.755
  Signal Layer 2 w0.2: v1(-82.05,-29.725) -35.15,-29.725 v1(-35.125,-29.75)
  Bottom Layer LF-Signals w0.175: R900.2@-35.175,-28.625 -35.125,-28.675 v1(-35.125,-29.75)
PB13: J400.5 J504.5@-67.93,-88.674 U200.144 | length 68.5
  Top Layer LF-Signals w0.18: J504.5@-67.93,-88.674 -69.676,-88.674 -71.168,-87.182 -71.168,-51.932 -72.526,-50.574 -70.2,-48.248 -70.2,-42.725 -69.2,-41.725 -65.975,-41.725 -62.65,-38.4 -58.065,-38.4 -57.015,-39.45 U200.144@-53.75,-39.45
PC00: J404.3 U200.11 U601.A6 | length 80.6
  Top Layer LF-Signals w0.15: J404.3@-86.15,-68.1 v3(-85.1,-68.1) ; v1(-61.825,-72.825) -61.825,-74.825 -57.025,-79.625 -57.025,-80.179 -56.629,-80.575 -55.722,-80.575 U601.A6@-55.222,-80.075 v1(-54.172,-80.075) ; U200.11@-55.6,-46.25 -53.205,-46.25 v1(-53.203,-46.252)
  Signal Layer 1 w0.15: v1(-54.172,-80.075) -55.325,-80.075 -55.861,-79.539 -56.511,-79.539 -57.125,-78.925 -58.622,-77.428 -58.622,-62.276 -52.725,-56.379 -52.725,-50.902 -53.203,-50.425 v1(-53.203,-46.252)
  Signal Layer 2 w0.15: v3(-85.1,-68.1) -71.826,-68.1 -70.476,-69.45 -65.2,-69.45 v1(-61.825,-72.825)
PC01: J404.4 U200.38 U601.B7 | length 82.9
  Top Layer LF-Signals w0.15: J404.4@-86.15,-68.6 v3(-83.9,-68.6) ; U601.B7@-55.872,-79.425 -56.756,-79.425 -61.325,-74.856 v1(-61.325,-73.4) -61.325,-72.575 -61.875,-72.025 -61.875,-70.5 -59.475,-68.1 -59.475,-67.05 -54.45,-62.025 -54.163,-62.312 -59.162,-67.312 -58.9,-67.575 -53.813,-62.488 -53.55,-62.75 -58.638,-67.837 -58.4,-68.075 -53.25,-62.925 U200.38@-53.25,-60.55
  Signal Layer 2 w0.15: v3(-83.9,-68.6) -71.751,-68.6 -70.601,-69.75 -65.651,-69.75 -62.001,-73.4 v1(-61.325,-73.4)
PC02: J404.5 U200.39 U601.C7 | length 82.9
  Top Layer LF-Signals w0.15: J404.5@-86.15,-69.1 v3(-82.7,-69.1) ; U601.C7@-55.872,-78.775 -56.981,-78.775 -60.825,-74.931 v1(-60.825,-74.075) -60.825,-72.5 -61.4,-71.925 -61.4,-70.6 -58.887,-68.087 -58.662,-68.312 -60.95,-70.6 -60.7,-70.85 -53.3,-63.45 -53.075,-63.675 -61.012,-71.613 -60.8,-71.825 -52.75,-63.775 U200.39@-52.75,-60.55
  Signal Layer 2 w0.15: v3(-82.7,-69.1) -71.675,-69.1 -68.777,-71.998 -63.828,-71.998 -61.976,-73.85 -61.729,-73.85 -61.504,-74.075 v1(-60.825,-74.075)
PC03: J404.6 U200.40 U601.D7 | length 82.5
  Top Layer LF-Signals w0.15: J404.6@-86.15,-69.6 v3(-85.1,-69.6) ; U601.D7@-55.872,-78.125 -57.207,-78.125 -60.325,-75.007 v1(-60.325,-74.675) -60.325,-73.7 -60.525,-73.5 -60.525,-72.025 -52.837,-64.337 -52.625,-64.55 -59.825,-71.75 -59.825,-72.195 -60.175,-72.195 -60.175,-72.594 -59.803,-72.594 -59.803,-72.95 -60.207,-72.95 -60.207,-73.303 -59.825,-73.303 -59.825,-75.003 -59.475,-75.003 -59.475,-71.85 -52.71,-65.085 -52.562,-65.085 -52.562,-65.894 -52.25,-65.894 U200.40@-52.25,-60.55
  Signal Layer 2 w0.15: v3(-85.1,-69.6) -71.775,-69.6 -69.077,-72.298 -63.952,-72.298 -61.575,-74.675 v1(-60.325,-74.675)
PC04: J404.8 U200.41 U601.D6 | length 81.9
  Top Layer LF-Signals w0.15: J404.8@-86.15,-70.6 v3(-82.7,-70.6) v3@-82.675,-70.6 ; v1(-57.7,-76.925) -57.725,-76.925 -59.175,-75.475 -59.175,-72.046 -53.354,-66.225 -53.09,-65.96 -52.825,-66.225 -56.063,-69.462 -55.8,-69.725 -52.562,-66.487 -52.312,-66.737 -55.537,-69.962 -55.325,-70.175 -53.175,-68.025 -52.825,-68.025 -52.825,-69.125 -52.475,-69.125 -52.475,-67.475 -52.15,-67.475 -52.15,-69.15 -51.85,-69.15 -51.85,-61.9 -51.75,-61.8 U200.41@-51.75,-60.55 ; U601.D6@-55.222,-78.125 v1(-54.647,-78.125)
  Signal Layer 1 w0.15: v1(-57.7,-76.925) -57.7,-76.929 -56.504,-78.125 v1(-54.647,-78.125)
  Signal Layer 2 w0.15: v3(-82.7,-70.6) -75,-70.6 -70.95,-74.65 -62.024,-74.65 -61.699,-74.975 -61.101,-74.975 -59.151,-76.925 v1(-57.7,-76.925)
PC05: J404.9 U200.58 U601.E7 | length 82.8
  Top Layer LF-Signals w0.15: J404.9@-86.15,-71.1 v3(-85.1,-71.1) ; v1(-56.447,-77.475) U601.E7@-55.872,-77.475 ; v1(-43.25,-62.125) U200.58@-43.25,-60.55
  Signal Layer 1 w0.15: v1(-56.447,-77.475) -55.297,-76.325 -53.001,-76.325 -52.301,-75.625 -50.5,-75.625 -50.05,-76.075 -50.05,-78.25 -49.725,-78.25 -49.725,-75.975 -49.4,-75.975 -49.4,-78.775 -49.025,-78.775 -49.025,-75.975 -48.675,-75.975 -48.675,-78.875 -46.7,-78.875 -46.7,-66.55 -44.725,-64.575 -44.725,-63.643 -44.75,-63.618 -44.75,-61.592 -44.533,-61.375 -43.25,-61.375 -43.025,-61.15 -43.025,-60.25 -43,-60.225 -42.65,-60.225 -42.65,-61.525 v1(-43.25,-62.125)
  Signal Layer 2 w0.15: v3(-85.1,-71.1) -85.1,-71.625 -84.525,-72.2 -83.6,-72.2 -83,-71.6 -74.849,-71.6 -71.199,-75.25 -62.273,-75.25 -61.948,-75.575 -61.4,-75.575 -59.025,-77.95 -58.25,-77.95 -57.286,-77.95 -56.922,-77.95 v1(-56.447,-77.475)
PC06: J404.10 U200.54 U601.F7 | length 83.7
  Top Layer LF-Signals w0.15: J404.10@-86.15,-71.6 v3(-83.9,-71.6) ; v1(-56.922,-76.825) U601.F7@-55.872,-76.825 ; v1(-45.727,-62.278) -45.25,-61.8 U200.54@-45.25,-60.55
  Signal Layer 1 w0.15: v1(-56.922,-76.825) -56.122,-76.025 -53.125,-76.025 -52.35,-75.25 -48.625,-75.25 -48.575,-75.2 -48.575,-74.225 -48.175,-74.225 -48.175,-78.525 -47.8,-78.525 -47.8,-73.5 -47.4,-73.5 -47.4,-78.525 -47.025,-78.525 -47.025,-66.375 -46.225,-65.575 -46.225,-64.563 -45.54,-64.563 -45.54,-64.238 -47.125,-64.238 -47.125,-63.913 -45.725,-63.913 -45.725,-63.588 -46.995,-63.588 -46.995,-63.263 -46.225,-63.263 -46.225,-62.776 v1(-45.727,-62.278)
  Signal Layer 2 w0.15: v3(-83.9,-71.6) -83.4,-71.1 -74.924,-71.1 -71.074,-74.95 -62.149,-74.95 -61.824,-75.275 -61.225,-75.275 -59.075,-77.425 -57.493,-77.425 -56.922,-76.854 v1(-56.922,-76.825)
PC07: J404.11 U200.48 U601.G7 | length 81.6
  Top Layer LF-Signals w0.15: J404.11@-86.15,-72.1 v3(-82.7,-72.1) v3@-82.675,-72.1 ; v1(-61.525,-76.175) -59.1,-78.6 -59.1,-79.7 -56.675,-82.125 -49.175,-82.125 -48,-80.95 -48,-73.65 -47.625,-73.275 -47.625,-71.35 -48.525,-70.45 -48.525,-70.025 -48.825,-70.025 -48.825,-69.725 -48.225,-69.725 -48.225,-69.425 -48.825,-69.425 -48.825,-69.125 -48.225,-69.125 -48.225,-68.825 -48.825,-68.825 -48.825,-68.525 -48.225,-68.525 -48.225,-68.225 -48.825,-68.225 -48.825,-67.925 -48.225,-67.925 -48.225,-67.625 -48.825,-67.625 -48.825,-67.325 -48.225,-67.325 -48.225,-67.025 -48.825,-67.025 -48.825,-66.725 -48.225,-66.725 -48.225,-66.425 -48.825,-66.425 -48.825,-66.125 -48.225,-66.125 -48.225,-65.825 -48.825,-65.825 -48.825,-65.525 -48.525,-65.525 -48.525,-65.225 -48.825,-65.225 -48.825,-64.925 -48.525,-64.925 -48.525,-64.625 -48.825,-64.625 -48.825,-64.325 -48.525,-64.325 -48.525,-64.025 -48.825,-64.025 -48.825,-63.725 -48.525,-63.725 -48.525,-63.425 -48.825,-63.425 -48.825,-63.125 -48.525,-63.125 -48.525,-62.675 -48.25,-62.4 U200.48@-48.25,-60.55 ; v1(-57.35,-76.175) U601.G7@-55.872,-76.175
  Signal Layer 2 w0.15: v3(-82.7,-72.1) -74.773,-72.1 -71.323,-75.55 -62.397,-75.55 -62.072,-75.875 -61.825,-75.875 v1(-61.525,-76.175)
  Bottom Layer LF-Signals w0.15: v1(-61.525,-76.175) v1(-57.35,-76.175)
PC08: J404.35 U200.82 | length 72.2
  Top Layer LF-Signals w0.15: J404.35@-86.15,-84.1 v1(-85.1,-84.1) ; v1(-36.325,-54.25) U200.82@-34.4,-54.25
  Signal Layer 1 w0.15: v1(-85.1,-84.1) -81.797,-84.1
  Signal Layer 1 w0.175: -81.797,-84.1 -73.856,-76.158 -73.856,-65.269 -70.653,-62.067 v3(-70.653,-59.628)
  Signal Layer 2 w0.15: v3(-70.653,-59.628) -65.397,-59.628 -65.09,-59.935 -64.618,-59.935 -64.607,-59.925 -64.193,-59.925 -64.182,-59.935 -47.172,-59.935 -41.486,-54.25 v1(-36.325,-54.25)
PC09: D300.1 J404.46 J500.2@-19.67,-43.97 U200.86 | length 145.7
  Top Layer LF-Signals w0.15: J404.46@-86.15,-89.6 v1(-85.175,-89.6) ; D300.1@-84.955,-28.35 v1(-83.775,-28.35) ; v1(-35.925,-52.25) U200.86@-34.4,-52.25
  Signal Layer 1 w0.175: v1(-85.175,-89.6) -86.775,-88 v1(-86.775,-59.075) -88.25,-57.6 -88.25,-29.175 -87.425,-28.35 v1(-83.775,-28.35)
  Signal Layer 2 w0.15: v1(-86.775,-59.075) -69.772,-59.075 -69.578,-59.269 -66.244,-59.269 -62.894,-55.919 -60.919,-55.919 -58.538,-58.3 -53.1,-58.3 -47.053,-52.253 -35.928,-52.253 v1(-35.925,-52.25)
  Bottom Layer LF-Signals w0.175: v1(-35.925,-52.25) -35.4,-51.725 -31.225,-51.725 -23.47,-43.97 J500.2@-19.67,-43.97
PC11: J404.36 U200.94 | length 82
  Top Layer LF-Signals w0.15: J404.36@-86.15,-84.6 v1(-84.433,-84.6) ; v1(-35.827,-48.327) -34.477,-48.327 U200.94@-34.4,-48.25
  Signal Layer 1 w0.175: v1(-84.433,-84.6) -81.6,-84.6 -73.35,-76.35 -73.35,-68.788 -69.825,-65.263 -69.825,-59.525 -70.653,-58.697 v3(-70.653,-51.753)
  Signal Layer 2 w0.15: -50.552,-52.25 -47.197,-48.895 -36.47,-48.895 -35.902,-48.327 v1(-35.827,-48.327)
  Signal Layer 2 w0.175: v3(-70.653,-51.753) -65.928,-51.753 -64.363,-50.187 -60.296,-50.187 -58.221,-52.263 -50.564,-52.263 -50.552,-52.25
PC12: C1001.1 J507.33 U200.17 U1000.4 | length 80.1
  Top Layer LF-Signals w0.18: v1(-63.028,-50.727) -62.902,-50.727 -61.425,-49.25 U200.17@-55.6,-49.25 ; v1(-55.85,-115.6) C1001.1@-55.85,-116.58 -55.85,-117.08 -55.262,-117.668 U1000.4@-54.925,-117.668
  Signal Layer 1 w0.18: v1(-63.028,-50.727) -63.028,-61.528 -63.68,-62.18 -63.68,-75.208 -62.785,-76.103 -62.785,-96.359 J507.33@-60.31,-98.834 -61.575,-100.099 -61.575,-102.325 -58.825,-105.075 -58.825,-112.625 v1(-55.85,-115.6)
PC13: J402.4@-4.43,-66.83 J404.47 J502.5@-67.93,-65.814 U200.19 | length 125
  Top Layer LF-Signals w0.15: J404.47@-86.15,-90.1 -83.25,-90.1 v1(-83.2,-90.15)
  Top Layer LF-Signals w0.18: v1(-67.175,-54.125) -67.175,-53.5 -65.75,-52.075 -62.6,-52.075 -60.76,-50.235 -55.6,-50.235 U200.19@-55.6,-50.25
  Signal Layer 1 w0.175: v1(-83.2,-90.15) -81.7,-88.65 -81.7,-85.25 -71.616,-75.166 -71.616,-69.5 J502.5@-67.93,-65.814 -66.75,-64.634 -66.75,-54.55 v1(-67.175,-54.125)
  Signal Layer 2 w0.18: J502.5@-67.93,-65.814 -53.386,-65.814 -52.825,-66.375 -43.675,-66.375 -43.585,-66.285 -35.848,-66.285 -34.243,-67.89 -21.657,-67.89 -21.031,-67.264 -15.636,-67.264 -14.9,-68 -5.6,-68 J402.4@-4.43,-66.83
PC14: J507.34 U200.97 U1000.1 | length 104.3
  Top Layer LF-Signals w0.18: U1000.1@-52.975,-117.668 -52.593,-117.668 -52.2,-117.275 -52.25,-117.225 v1(-52.25,-115.275) ; v1(-45.025,-47.575) -43.885,-46.435 -38.222,-46.435 -37.732,-46.925 -36.658,-46.925 -36.483,-46.75 U200.97@-34.4,-46.75
  Signal Layer 1 w0.18: v1(-62.5,-49.575) -62.5,-57.333 -62.68,-57.513 -62.68,-61.75 -63.35,-62.42 -63.35,-75 -62.455,-75.895 -62.455,-94.845 -59.125,-98.175 -59.125,-100.189 J507.34@-60.31,-101.374 -58.495,-103.189 -58.495,-109.03 v1(-52.25,-115.275)
  Signal Layer 2 w0.15: v1(-62.5,-49.575) -56.522,-49.575 -55.199,-48.252 -49.262,-48.252 -48.989,-47.98 -45.43,-47.98 v1(-45.025,-47.575)
PC15: R604.2 U200.18 U601.L7 | length 51.5
  Top Layer LF-Signals w0.15: R604.2@-57.997,-73.575 v1(-56.447,-73.575) U601.L7@-55.872,-73.575 ; U200.18@-55.6,-49.75 -54.362,-49.75 -54.362,-51.45 -54.037,-51.45 -54.037,-49.75 -53.712,-49.75 -53.712,-52.29 -53.387,-52.29 -53.387,-49.75 -53.062,-49.75 -53.062,-52.29 -52.737,-52.29 -52.737,-49.75 -52.412,-49.75 -52.412,-52.29 -52.087,-52.29 -52.087,-49.75 v3(-51.55,-49.75)
  Signal Layer 1 w0.15: v1(-56.447,-73.575) -57.422,-72.6 -57.422,-62.773 -51.525,-56.876 -51.525,-56.13 -51.525,-50.405 -51.525,-49.775 v3(-51.55,-49.75)
PC16: R121.1 U103.4 U200.100 | length 56
  Top Layer LF-Signals w0.15: v3(-39.1,-30.25) -39.1,-25.2 -38.575,-24.675 -34.65,-24.675 -32.975,-23 -32.975,-18.4 -28.05,-13.475 -28.05,-12.05 -29.45,-10.65 v1(-29.45,-8.65) ; v1(-37.227,-45.227) -37.204,-45.25 U200.100@-34.4,-45.25
  Signal Layer 1 w0.175: v3(-39.1,-30.25) -37.227,-32.123 v1(-37.227,-45.227)
  Bottom Layer LF-Signals w0.175: v1(-29.45,-8.65) -30.975,-7.125 -30.975,-4.6 -30.45,-4.075 R121.1@-28.95,-4.075 -28.028,-4.075 U103.4@-27.678,-4.425
PC17: Q106.1 R127.1 U200.103 | length 90.5
  Top Layer LF-Signals w0.18: v1(-35.925,-43.75) U200.103@-34.4,-43.75
  Signal Layer 1 w0.18: v3(-81.55,-44.1) -81.55,-30.727 -80.45,-29.627 -80.45,-22.775 v1(-81.25,-21.975)
  Signal Layer 2 w0.18: v3(-81.55,-44.1) -80.55,-45.1 -71.325,-45.1 -70.475,-44.25 -60.259,-44.25 -58.709,-45.8 -54.14,-45.8 -51.15,-42.81 -42.795,-42.81 -41.855,-43.75 v1(-35.925,-43.75)
  Bottom Layer LF-Signals w0.175: Q106.1@-86.775,-9.5 -86.775,-8.475 R127.1@-86.325,-8.025
  Bottom Layer LF-Signals w0.18: Q106.1@-86.775,-9.5 -86.775,-9.85 -86.15,-10.475 -84.425,-10.475 -81.25,-13.65 v1(-81.25,-21.975)
PC18: U200.111 U601.J6 | length 85.3
  Top Layer LF-Signals w0.15: U601.J6@-55.222,-74.875 v1(-54.172,-74.875) ; v3(-44.125,-43.325) -38.85,-43.325 -37.25,-41.725 U200.111@-37.25,-39.45
  Signal Layer 1 w0.15: v1(-54.172,-74.875) -55.74,-74.875 -56.24,-75.375 -56.788,-75.375 -56.988,-75.175 -58.022,-74.141 -58.022,-62.524 -52.125,-56.627 -52.125,-56.379 -52.125,-50.654 -52.35,-50.429 -52.35,-47.15 -52.203,-47.003 -52.203,-45.138 -53.153,-45.138 -53.153,-44.813 -51.252,-44.813 -51.252,-44.488 -53.153,-44.488 -53.153,-44.162 -51.252,-44.162 -51.252,-43.837 -53.153,-43.837 -53.153,-43.512 -51.252,-43.512 -51.252,-43.187 -53.153,-43.187 -53.153,-42.862 -51.252,-42.862 -51.252,-42.537 -53.153,-42.537 -53.153,-42.212 -51.252,-42.212 -51.252,-41.887 -53.153,-41.887 -53.153,-41.562 -52.203,-41.562 -52.203,-39.35 -44.85,-39.35 -44.125,-40.075 v3(-44.125,-43.325)
PC19: J400.6 J402.7@-6.97,-71.91 J503.7@-19.67,-53.114 U200.117 | length 115.4
  Top Layer LF-Signals w0.175: v1@-78.661,-51.827 J400.6@-78.661,-50.574 ; v1(-40.25,-41.175) U200.117@-40.25,-39.45
  Signal Layer 1 w0.175: v1(-79.475,-41.525) -79.475,-45.125 -78.658,-45.942 v1(-78.658,-51.83)
  Signal Layer 1 w0.18: v1(-21.725,-40.55) -20.875,-41.4 -20.875,-51.909 J503.7@-19.67,-53.114 -13.386,-53.114 -12.075,-54.425 -12.075,-66.805 J402.7@-6.97,-71.91
  Signal Layer 2 w0.18: v1(-79.475,-41.525) -79.1,-41.15 -72,-41.15 -71.646,-41.504 -63.658,-41.504 -61.374,-39.22 -53.638,-39.22 -51.393,-41.465 -40.54,-41.465 v1(-40.25,-41.175) -39.27,-40.195 -25.224,-40.195 -24.869,-40.55 v1(-21.725,-40.55)
PC20: U200.120 U601.N6 | length 53.7
  Top Layer LF-Signals w0.15: U601.N6@-55.222,-72.275 v3(-53.45,-72.275) ; v1(-45.475,-46.95) -44.425,-45.9 -39.1,-45.9 -39.1,-45.55 -44.475,-45.55 -44.75,-45.275 -44.75,-43.15 -44.35,-42.75 -41.75,-42.75 U200.120@-41.75,-39.45
  Signal Layer 1 w0.15: v3(-53.45,-72.275) -52.675,-72.275 -50.825,-72.275 -49.5,-70.95 -49.5,-69.9 -49.75,-69.65 -49.75,-61.572 -47.477,-59.299 -47.477,-48.952 v1(-45.475,-46.95)
PC21: U200.122 U601.P7 | length 51.4
  Top Layer LF-Signals w0.15: v1(-56.922,-71.625) U601.P7@-55.872,-71.625 ; v3(-45.752,-44.427) -45.752,-46.15 -45.275,-46.15 -45.275,-42.725 -44.225,-41.675 -42.425,-41.675 -42.425,-42.075 -44.175,-42.075 -44.175,-42.425 -42.075,-42.425 -42.075,-41.15 -42.75,-40.475 U200.122@-42.75,-39.45
  Signal Layer 1 w0.15: v1(-56.922,-71.625) -56.39,-71.625 -55.995,-71.23 -55.775,-71.01 -55.775,-61.55 -51.05,-56.825 -51.05,-47.249 -48.226,-44.425 v3(-45.752,-44.427)
PC22: U200.124 U601.P6 | length 54.6
  Top Layer LF-Signals w0.15: U601.P6@-55.222,-71.625 v1(-54.05,-71.625) ; v3(-46.475,-47.1) -46.475,-50.875 -46.975,-50.875 -46.975,-49.863 -47.969,-49.863 -47.969,-49.538 -46.975,-49.538 -46.975,-49.213 -47.969,-49.213 -47.969,-48.888 -46.975,-48.888 -46.975,-48.563 -47.969,-48.563 -47.969,-48.238 -46.975,-48.238 -46.975,-47.913 -47.275,-47.913 -47.275,-47.587 -46.975,-47.587 -46.975,-45.85 -46.475,-45.35 -46.475,-43.425 -43.75,-40.7 U200.124@-43.75,-39.45
  Signal Layer 1 w0.15: v1(-54.05,-71.625) -50.743,-71.625 -49.8,-70.682 -49.8,-70.075 -50.05,-69.825 -50.05,-61.448 -47.777,-59.175 -47.777,-48.402 v3(-46.475,-47.1)